# EAGLE board lna_breakout (EAGLE 6.2)
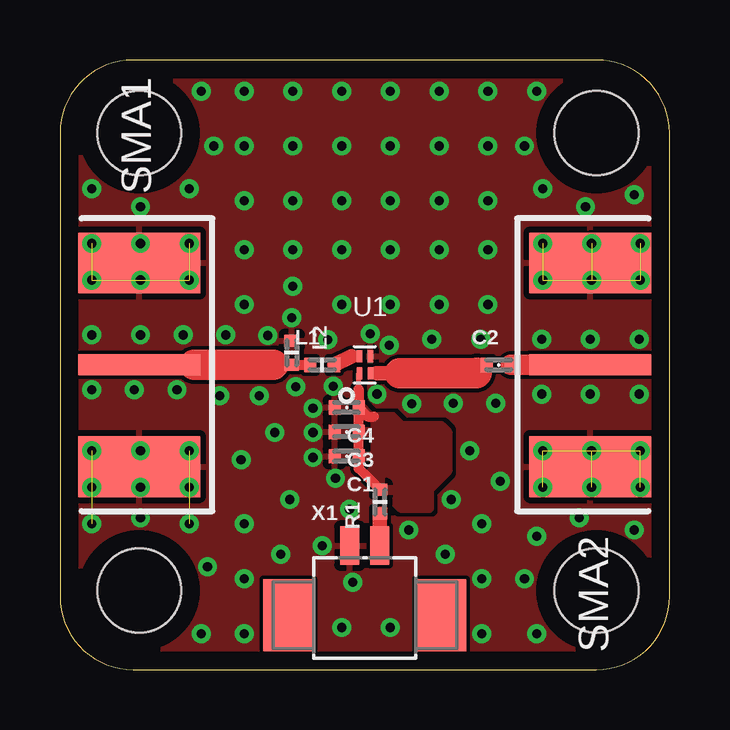
[diagram p0: board, top side]
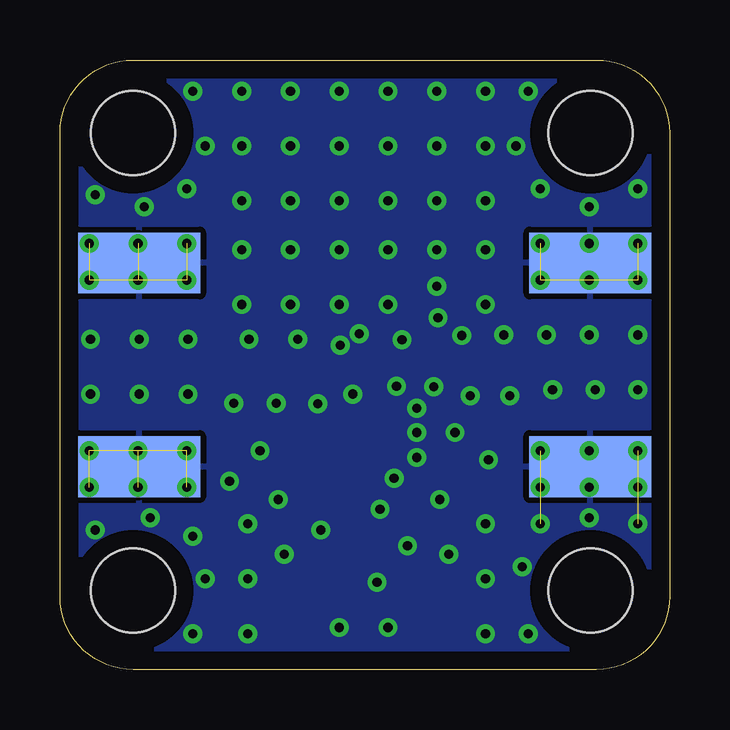
[diagram p1: board, bottom side, seen from below]

Size 25.4 x 25.4 mm. Coordinates in mm from the lower left corner, seen from the top.
Outline: 0,22.35 0,3.05 arc90 3.05,0 22.35,0 arc90 25.4,3.05 25.4,22.35 arc90 22.35,25.4 3.05,25.4 arc90 0,22.35
Copper layers (1*16): Top 0.035mm / dielectric 1.5mm / Bottom 0.035mm
Design rules: minimum track width 6mil, minimum drill 15mil, track to track 6mil, track to pad 6mil, pad to pad 6mil, via to via 6mil, smd to smd 6mil, copper to edge 30mil, drill to drill 8mil, minimum pad ring 10mil, minimum via ring 8mil, stop-mask expansion 4mil, vias tented up to drill 0mil, thermal gap 10mil
Holes 3.5 mm at 3.3,3.3 22.35,3.3 3.3,22.35 22.35,22.35

## Footprints (pad centres in the part's own frame; a part is rotated, then mirrored left to right if it is on the bottom)
0402-CAP = smd 0.5 x 0.6: P$1 -0.5,0; P$2 0.5,0
0402-IND = smd 0.5 x 0.6: P$1 -0.5,0; P$2 0.5,0
0402-RES = smd 0.5 x 0.6: P$1 -0.5,0; P$2 0.5,0
SMA_EDGE = smd 0.889 x 5.08: P1 0,-2.54 | smd 2.54 x 5.08: P2 -4.242,-2.54; P3 4.242,-2.54 | smd 2.54 x 5.08 bottom: P4 -4.242,-2.54; P5 4.242,-2.54
XC2401 = smd 0.229 x 0.508: 1 -0.229,-0.356; 2 0.229,-0.356; 3 0.229,0.356; 4 -0.229,0.356
PB-53261-02 = smd 0.8 x 1.6: 1 -0.625,1.1; 2 0.625,1.1 | smd 2.1 x 3: MNT1 -3.175,-1.8; MNT2 3.175,-1.8

## Placement (x,y rotation side)
C1  10nF  [0402-CAP]  11.94,8.89 180 top
C2  100pF  [0402-CAP]  18.29,12.7 0 top
C3  100pF  [0402-CAP]  11.94,9.91 180 top
C4  1pF  [0402-CAP]  11.94,10.92 180 top
L1  6.2nH  [0402-IND]  10.92,12.7 0 top
L2  9.1nH  [0402-IND]  9.65,13.21 270 top
R1  600  [0402-RES]  13.34,6.99 90 top
SMA1  SMA_EDGE  [SMA_EDGE]  0.76,12.7 90 top
SMA2  SMA_EDGE  [SMA_EDGE]  24.64,12.7 270 top
U1  XC2401  [XC2401]  12.7,12.7 0 top
X1  [PB-53261-02]  12.7,4.06 0 top

## Library data of the parts
C1-C4 L1 L2 R1 = pel_dipol_comp
SMA1 SMA2 U1 = swift-nav
X1 = pel_molex

## Nets
GND: C1.P$2 C3.P$2 C4.P$2 L2.P$1 SMA1.P2 SMA1.P3 SMA1.P4 SMA1.P5 SMA2.P2 SMA2.P3 SMA2.P4 SMA2.P5 U1.3 X1.1
N$1: C1.P$1 C3.P$1 C4.P$1 R1.P$2 U1.1
N$2: C2.P$1 U1.2
N$3: C2.P$2 SMA2.P1
N$4: L1.P$1 L2.P$2 SMA1.P1
N$5: L1.P$2 U1.4
N$6: R1.P$1 X1.2

## Tracks (layer width: path | path; a pad name or v marks a point on that pad's centre or on a via)
GND  (via drill 0.38)  (8 unrouted)
  other vias: 9.83,11.79 8.31,11.4 6.91,13.94 8.66,13.92 9.65,14.66 11.15,13.74 11.38,11.81 10.54,10.9 10.54,9.88 10.54,8.84 14.66,11.07 12.93,14 13.72,13.51 3.35,13.94 1.32,13.94 6.65,11.4 3.1,11.66 1.32,11.66 15.49,13.77 17.53,13.77 13.21,11.48 16.38,11.1 18.16,11.1 20.07,11.48 22.1,11.48 24.13,11.48 24.13,13.77 22.1,13.77 20.07,13.77 1.32,16.23 3.35,16.23 5.38,16.23 5.38,17.75 3.35,17.75 1.32,17.75 1.32,9.12 3.35,9.12 5.38,9.12 5.38,7.59 3.35,7.59 1.32,7.59 12.06,6.68 10.92,5.16 12.19,3.63 5.89,24.1 11.73,21.82 9.7,21.82 7.67,21.82 6.4,21.82 5.38,20.04 3.35,19.28 1.32,20.04 11.73,19.53 9.7,19.53 7.67,19.53 11.73,24.1 9.7,24.1 7.67,24.1 17.83,24.1 15.8,24.1 13.77,24.1 17.83,21.82 15.8,21.82 13.77,21.82 17.83,19.53 15.8,19.53 13.77,19.53 23.93,19.79 21.89,19.28 20.12,20.04 19.35,21.82 19.86,24.1 17.83,17.5 15.8,17.5 13.77,17.5 11.73,17.5 9.7,17.5 7.67,17.5 9.7,15.98 17.83,15.21 15.8,15.21 13.77,15.21 11.73,15.21 7.67,15.21 5.38,6.07 3.35,6.32 1.32,6.07 6.15,4.29 5.89,1.5 7.67,3.78 7.67,6.07 7.67,1.5 21.64,6.32 19.86,5.56 17.58,6.07 23.93,5.82 19.35,3.78 17.58,3.78 19.86,1.5 17.58,1.5 7.54,8.74 11.48,7.98 9.19,4.8 14.53,5.82 13.77,1.75 11.73,1.75 17.07,9.12 18.34,7.85 16.31,7.09 16.05,4.8 5.13,13.94 4.88,11.66 8.94,9.88 9.58,7.09
  pour Top (isolate 0.152, rank 2): -0.25,25.65 25.65,25.65 25.65,11.81 25.53,11.68 25.53,6.6 25.65,-0.25 -0.25,-0.25
  pour Bottom: -0.25,25.65 25.65,25.65 25.65,-0.25 -0.25,-0.25
GND1  (via drill 0.38)  (5 unrouted)
  other vias: 20.12,16.23 22.15,16.23 24.18,16.23 24.18,17.75 22.15,17.75 20.12,17.75
GND2  (via drill 0.38)  (5 unrouted)
  other vias: 20.12,7.59 22.15,7.59 24.18,7.59 24.18,9.12 22.15,9.12 20.12,9.12
N$1
  Top 0.203: 12.45,11.68 12.45,12.32 U1.1
  Top 0.406: 12.45,11.68 12.45,10.94 arc-45 C4.P$1 | C4.P$1 C3.P$1 C1.P$1 12.44,8.38 R1.P$2 | C4.P$1 12.82,10.54 13.08,10.54
  pour Top: 12.45,11.05 12.95,10.54 13.21,10.54 13.84,10.54 14.22,10.16 15.88,10.16 16.13,9.91 16.13,8.26 15.37,7.49 15.37,6.73 14.22,6.73 12.45,8.51
N$2
  Top 0.203: U1.2 13.21,12.34
  Top 0.254: 17.37,12.37 17.46,12.37 C2.P$1
  Top 0.61: 13.21,12.34 14.15,12.34
  Top 1.27: 14.15,12.34 17.35,12.34 17.37,12.37
N$3
  Top 0.864: C2.P$2 SMA2.P1
N$4
  Top 0.254: SMA1.P1 5.59,12.7
  Top 0.406: 8.89,12.7 8.89,12.71 L2.P$2 L1.P$1
  Top 1.27: 5.59,12.7 8.88,12.7 8.89,12.71
N$5
  Top 0.203: 12.17,13.06 U1.4 12.5,13.06
  Top 0.61: L1.P$2 12.17,13.06
N$6
  Top 0.61: R1.P$1 13.32,6.47 X1.2